# Altium PCB Init_Nfc_v1.0.PcbDoc
Units mm, origin at the board's own origin, x right, y up, seen from the top; angles counter-clockwise.
Board outline 84.91 x 61.77 mm, 2 copper layers (Top Layer, Bottom Layer); 25 components, 27 nets, 142 pads, 25 vias.
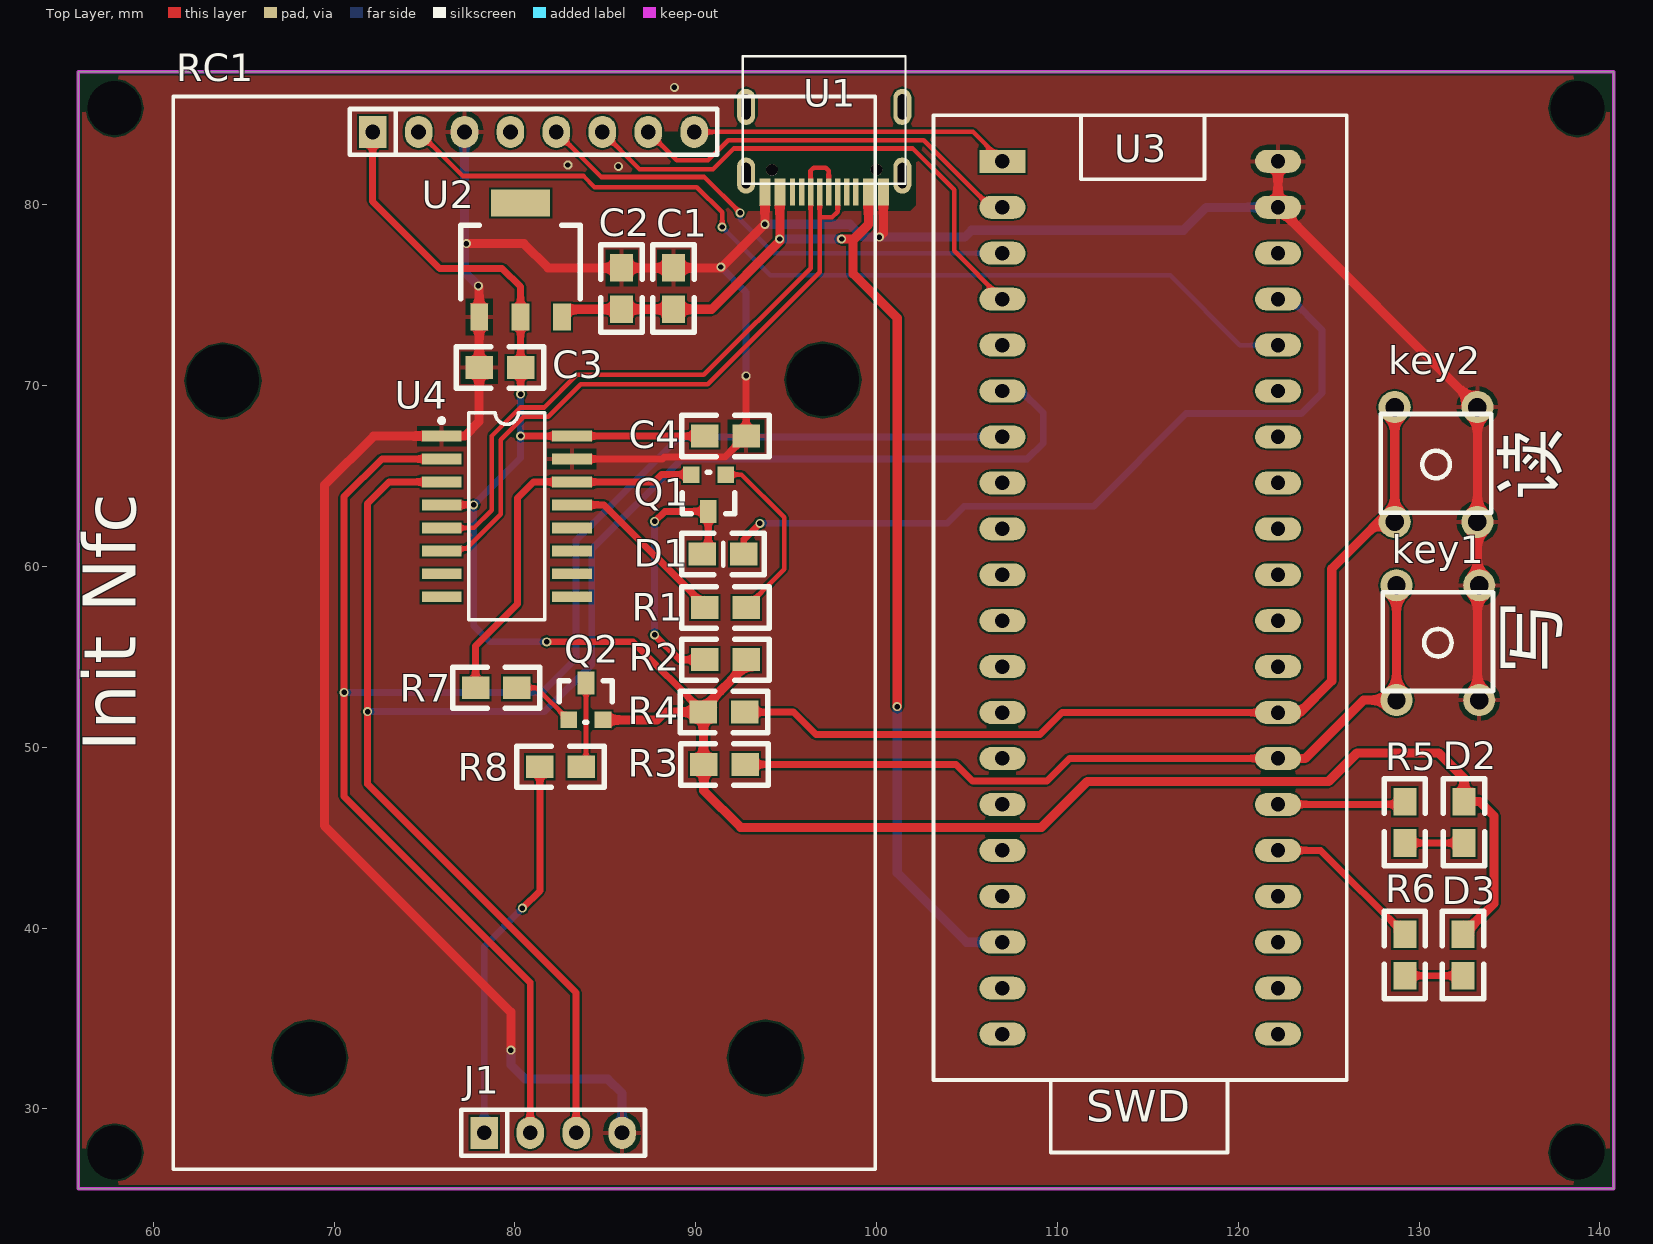
[diagram p0: Top Layer view]
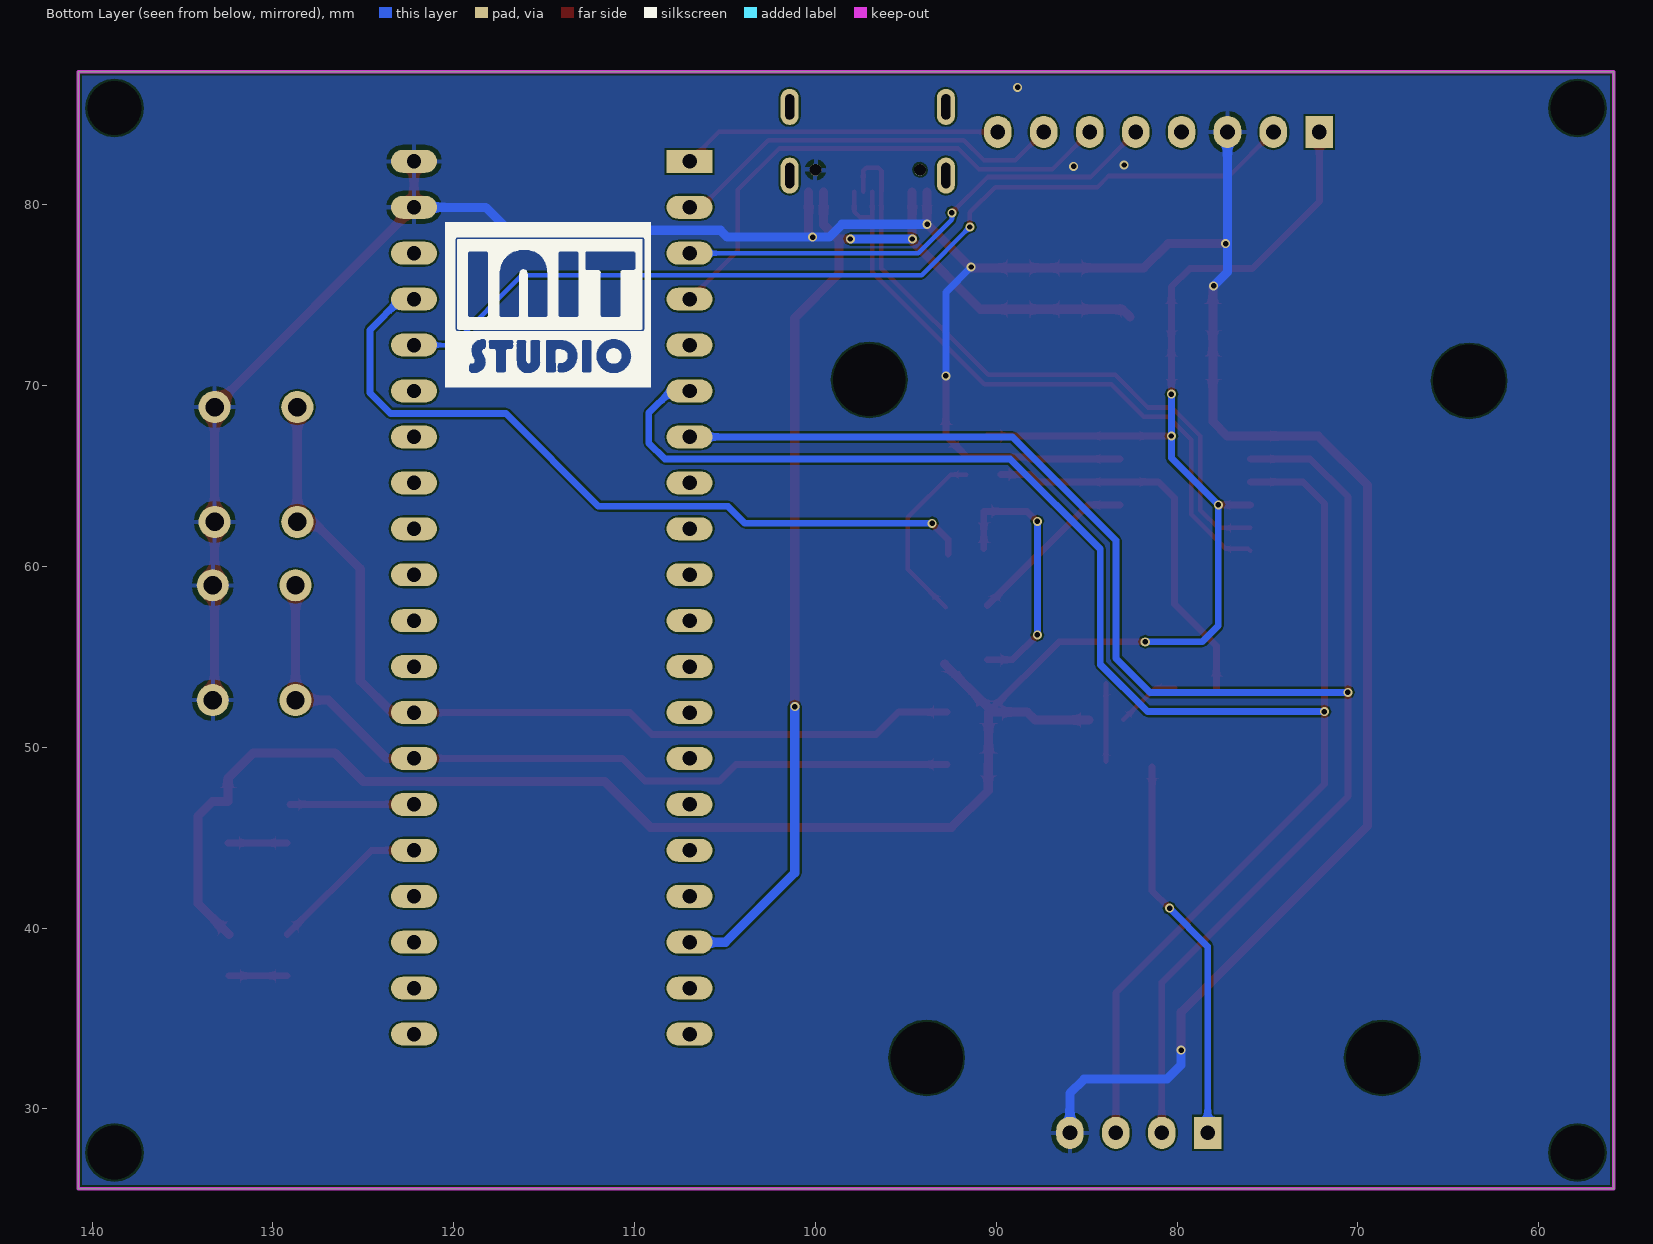
[diagram p1: Bottom Layer view, seen from below]

## Layer stack, top to bottom
Top Solder: solder mask 0.0102, Solder Resist, Dk 3.5
Top Layer: signal copper 0.0356
Dielectric1: dielectric 0.32, FR-4, Dk 4.8
Bottom Layer: signal copper 0.0356
Bottom Solder: solder mask 0.0102, Solder Resist, Dk 3.5

## Board outline
55.855,25.578 55.855,87.351 140.767,87.351 140.767,25.578

## Design rules (kind name [scope] priority, off if disabled: settings)
Clearance [All] p1: gap=0.1
DiffPairsRouting [All] p1: maxlimit=0.254 minlimit=0.254 mostfreqgap=0.254 toplayer_minwidth=0.152 toplayer_maxwidth=0.381 toplayer_prefwidth=0.381 bottomlayer_minwidth=0.152 bottomlayer_maxwidth=0.381 bottomlayer_prefwidth=0.381 maxuncoupledlength=12.7
PolygonConnect PolygonConnect_1 [IsVia] p1: connectstyle=Direct reliefconductorwidth=0.254 reliefentries=4 polygonreliefangle="90 Angle" airgapwidth=0.254
PolygonConnect [All] p2: connectstyle=Relief reliefconductorwidth=0.254 reliefentries=4 polygonreliefangle="90 Angle" airgapwidth=0.254
RoutingVias [All] p1: holewidth=0.3 width=0.5 viastyle="Through Hole" minholewidth=0.3 minwidth=0.5 maxholewidth=0.3 maxwidth=0.5
SilkToSolderMaskClearance SilkscreenOverComponentPads [IsPad] p1: minsilkscreentomaskgap=0.254 clearancetoexposedcopper=TRUE
SolderMaskExpansion [All] p1: expansion=0.102
Width [All] p1: maxlimit=2 minlimit=0.254 preferedwidth=0.254
28 further rules are at their usual default settings.

## Classes and differential pairs
differential pair UD: +UD_P -UD_N

## Components (designator, comment, footprint, x,y, rotation, side; value= is the part's Value field where it differs from the comment)
C1 "Cap" 0805 88.773,76.505 r270 top
C2 "Cap" 0805 85.903,76.505 r270 top
C3 "Cap" 0805 78.029,70.993 r0 top
C4 "Cap" 0805 92.786,67.208 r180 top
D1 "DIODE" 0805L 92.659,60.554 r180 top
D2 "LED0" 0805 132.486,46.99 r270 top
D3 "LED0" 0805 132.436,39.649 r270 top
J1 "CON4" SIP4 82.118,28.677 r0 top
key1 "KEY" Key 130.988,55.753 r180 top
key2 "KEY" Key 130.886,65.608 r180 top
Q1 "8050" SOT23 90.703,64.059 r180 top
Q2 "8550" SOT23 83.922,52.527 r0 top
R1 "Res2" 0805 90.5,57.734 r0 top
R2 "Res2" 0805 92.786,54.839 r180 top
R3 "Res2" 0805 90.449,49.047 r0 top
R4 "Res2" 0805 92.71,51.943 r180 top
R5 "Res2" 0805 129.21,44.704 r90 top
R6 "Res2" 0805 129.21,37.363 r90 top
R7 "Res2" 0805 80.112,53.289 r180 top
R8 "Res2" 0805 81.382,48.92 r0 top
RC1 "CON8" RC522_SIP8 72.136,84.023 r0 top
U1 "Type_C_16" Type_C16 97.104,83.21 r90 top
U2 "AMS1117_3.3" SOT-223 78.029,73.787 r0 top
U3 "stm32f103c8t6core" stm32f103DIP40 106.959,82.398 r0 top
U4 "CH340C" SOP16 79.553,62.763 r270 top

## Footprints (in the part's own frame and the unit in brackets; to place one, negate y for a bottom-side part, rotate by r counter-clockwise, add the part's x,y. Pads: shape width x height; smd on the part's side, far side on the other; paste and mask are expansions set on the pad)
0805 [mil]
  rect 60x50 smd: 1(0,0) 2(90,0)
  silkscreen extent -50,-45 140,45
0805L [mil]
  rect 60x50 smd: 1(0,-5) 2(90,-5)
  silkscreen extent -45,-50 135,40
Key [mil]
  round 70 hole 40: 1(-92,124) 1(-92,-126) 2(88,124) 2(88,-126)
  silkscreen extent -122,-111 118,104, body extent -122,-159 122,152, height 276
RC522_SIP8 [mil]
  round 60 hole 157.48: 0(-326,-542) 0(-137,-2016) 0(855,-2016) 0(980,-540)
  rect 60x70 hole 32: 1(0,0)
  oval 60x70 hole 32: 2(100,0) 3(200,0) 4(300,0) 5(400,0) 6(500,0) 7(600,0) 8(700,0)
  silkscreen extent -434,-2258 1094,77, body extent -54,-49 746,49, height 323
SIP4 [mil]
  rect 60x70 hole 32: 1(-150,0)
  oval 60x70 hole 32: 2(-50,0) 3(50,0) 4(150,0)
  silkscreen extent -200,-50 200,50, body extent -204,-49 196,49, height 323
SOP16 [mm] "Small Outline; 16 Leads; Body Width 5.6 mm; Pit"
  rect 0.6x2.2 smd: 1(-4.445,-3.6) 2(-3.175,-3.6) 3(-1.905,-3.6) 4(-0.635,-3.6) 5(0.635,-3.6) 6(1.905,-3.6) 7(3.175,-3.6) 8(4.445,-3.6) 9(4.445,3.6) 10(3.175,3.6) 11(1.905,3.6) 12(0.635,3.6) 13(-0.635,3.6) 14(-1.905,3.6) 15(-3.175,3.6) 16(-4.445,3.6)
  silkscreen extent -5.73,-3.72 5.73,2.1, body extent -5.1,-3.96 5.1,3.96, height 1.8
SOT23 [mil]
  rect 36x36 smd: B(-37.5,-40) E(37.5,-40)
  rect 36x50 smd: C(0.5,40)
  silkscreen extent -58,-45 58,45, body extent -58,-48 60,56, height 43
SOT-223 [mil]
  rect 39x59 smd: 1(0,0) 3(180,0)
  rect 38.98x59.05 smd: 2(90,0)
  rect 129.13x59 smd: 4(90,248.03)
  silkscreen extent -40,40 220,200
stm32f103DIP40 [mm]
  rect 2.54x1.27 hole 0.8: 1(0,0)
  oval 2.54x1.27 hole 0.8: 2(0,-2.54) 3(0,-5.08) 4(0,-7.62) 5(0,-10.16) 6(0,-12.7) 7(0,-15.24) 8(0,-17.78) 9(0,-20.32) 10(0,-22.86) 11(0,-25.4) 12(0,-27.94) 13(0,-30.48) 14(0,-33.02) 15(0,-35.56) 16(0,-38.1) 17(0,-40.64) 18(0,-43.18) 19(0,-45.72) 20(0,-48.26) 21(15.24,-48.26) 22(15.24,-45.72) 23(15.24,-43.18) 24(15.24,-40.64) 25(15.24,-38.1) 26(15.24,-35.56) 27(15.24,-33.02) 28(15.24,-30.48) 29(15.24,-27.94) 30(15.24,-25.4) 31(15.24,-22.86) 32(15.24,-20.32) 33(15.24,-17.78) 34(15.24,-15.24) 35(15.24,-12.7) 36(15.24,-10.16) 37(15.24,-7.62) 38(15.24,-5.08) 39(15.24,-2.54) 40(15.24,0)
  silkscreen extent -3.81,-54.81 19.05,2.54
Type_C16 [mm] "16pin"
  round 0.65 hole 0.65: 0(-1.28,2.89) 1(-1.28,-2.89)
  rect 1.5x0.6 smd: 1(-2.5,3.275) 2(-2.5,2.45) 11(-2.5,-2.45) 12(-2.5,-3.275)
  rect 1.5x0.3 smd: 3(-2.5,1.75) 4(-2.5,1.25) 5(-2.5,0.75) 6(-2.5,0.25) 7(-2.5,-0.25) 8(-2.5,-0.75) 9(-2.5,-1.25) 10(-2.5,-1.75)
  oval 2x1 hole 0.5 slot 1.4 at 0 deg: ""(-1.6,4.32) ""(-1.6,-4.32) ""(2.2,4.32) ""(2.2,-4.32)
  silkscreen extent -2.05,-4.5 5,4.5

## Part data
C1 C2 C3 C4: "Capacitor"
D2 D3: "Typical INFRARED GaAs LED"
Q1: library part NPN
Q2: library part PNP
R1 R2 R3 R4 R5 R6 R7 R8: "Resistor"
U2: library part LM317, "3-Terminal Adjustable Positive Voltage Regulator"

## Free pads (board coordinates)
  round 1.524 hole 3: 0(57.861,85.344) 0(57.861,27.584) 0(138.76,85.344) 0(138.76,27.584)

## Via types
v1: diameter 0.5, hole 0.3, Top Layer to Bottom Layer, 25 vias

## Nets (pads, with @x,y where several pads share a name; then routed paths per layer and width w, separated by ;. In a path a pad name is that pad's centre, name@x,y a point inside that pad or via, vN(x,y) a via of type N, cw(c..) or ccw(c..) an arc to the next point about the centre after c; other vN are vias at no path point)
3V3: C3.2 C4.2 D2.1 D3.1 Q2.E R2.1 R3.1 R4.2 RC1.1 U2.2 U4.4 U4.16 | length 129.8
  Top Layer w0.381: RC1.1 72.136,80.188 75.844,76.479 79.299,76.479 80.315,75.463 U2.2 C3.2 v1(80.315,69.52) ; U4.4 v1(77.724,63.398) ; v1(80.315,67.208) U4.16 C4.2 ; v1(81.763,55.829) 86.538,55.829 R4.2 ; R3.1 R3.1@90.449,49.073 ; R4.2@90.449,51.943 R4.2@90.449,52.197
  Top Layer w0.508: Q2.E 87.859,51.511 88.29,51.943 R4.2 R3.1@90.424,49.073 ; R3.1 90.449,47.6 92.481,45.568 109.118,45.568 111.658,48.108 124.993,48.108 126.568,49.682 131.089,49.682 132.486,48.285 D2.1 133.35,46.99 134.137,46.203 134.137,41.351 D3.1 ; R4.2@90.449,52.197 R2.1@92.85,54.597
  Bottom Layer w0.381: v1(80.315,69.52) 80.315,65.989 v1(77.724,63.398) 77.724,56.718 78.613,55.829 v1(81.763,55.829)
5V: C1.2 C2.2 U1.2 U1.11 U2.3 U3.18 | length 67
  Top Layer w0.508: U2.3 83.033,74.219 C2.2 C1.2 90.881,74.219 94.654,77.992 U1.2 ; v1@98.044,78.105 v1(98.069,78.105) 98.704,78.105 98.704,76.175 101.143,73.736 v1(101.143,52.248) ; 98.755,78.105 99.554,78.904 U1.11
  Bottom Layer w0.508: v1(94.64,78.105) v1(98.069,78.105) ; v1(101.143,52.248) 101.143,43.053 104.978,39.218 U3.18
BOOT0: J1.1 R8.1 | length 21.5
  Top Layer w0.381: v1(80.416,41.097) 81.382,42.062 R8.1
  Bottom Layer w0.381: J1.1 78.308,38.989 v1(80.416,41.097)
CH340_RX: J1.3 U3.6 U4.3 | length 95.8
  Top Layer w0.381: U4.3 73.05,64.668 71.857,63.475 71.857,47.955 83.388,36.424 J1.3
  Bottom Layer w0.381: v1(71.857,51.968) 81.636,51.968 84.252,54.585 84.252,60.96 89.23,65.938 108.331,65.938 109.22,66.827 109.22,68.478 108.001,69.698 U3.6
CH340_TX: J1.2 U3.7 U4.2 | length 91.8
  Top Layer w0.381: U4.2 72.644,65.938 70.561,63.856 70.561,47.269 80.848,36.982 J1.2
  Bottom Layer w0.381: v1(70.561,53.035) 81.509,53.035 83.388,54.915 83.388,61.443 89.103,67.158 U3.7
GND: C1.1 C2.1 C3.1 C4.1 J1.4 key1.1 key2.1 RC1.3 U1.1 U1.12 U2.1 U3.39 U3.40 U4.1 U4.15 | length 177.8
  Top Layer w0.381: U4.15 88.163,65.938 88.265,66.04 91.618,66.04 C4.1 v1(92.786,70.536)
  Top Layer w0.5: v1(77.318,77.851) 80.493,77.851 81.839,76.505 C2.1 C1.1 91.415,76.505 v1(93.829,78.919) U1.1@93.829,80.71 ; v1(77.978,75.514) 78.029,75.463 U2.1 C3.1 78.029,68.021 77.216,67.208 U4.1 72.187,67.208 69.469,64.491 69.469,45.669 79.781,35.357 v1(79.781,33.249) ; v1(100.152,78.207) 100.379,78.434 U1.12
  Top Layer w0.508: U3.40 U3.39 133.223,68.834 133.223,68.809 133.223,62.459 key1.1@133.223,52.705
  Bottom Layer w0.381: v1(91.389,76.556) 92.786,75.159 v1(92.786,70.536)
  Bottom Layer w0.5: RC1.3 77.216,76.276 v1(77.978,75.514) ; v1(79.781,33.249) 79.781,32.436 80.569,31.648 85.141,31.648 85.928,30.861 J1.4 ; v1(93.829,78.919) 98.525,78.919 99.238,78.207 v1(100.152,78.207) 104.877,78.207 105.258,78.588 116.967,78.588 118.237,79.858 U3.39
  other v1: 85.725,82.118 82.931,82.194 88.824,86.487
KEY1: key1.2 R3.2 U3.27 | length 44.6
  Top Layer w0.381: R3.2 104.394,49.047 105.308,48.133 109.423,48.133 110.668,49.378 U3.27
  Top Layer w0.508: U3.27 123.698,49.378 126.924,52.603 128.753,52.603 key1.2@128.753,58.953
KEY2: key2.2 R4.1 U3.28 | length 51.3
  Top Layer w0.381: R4.1 95.402,51.943 96.647,50.698 109.042,50.698 110.261,51.918 U3.28
  Top Layer w0.508: U3.28 123.419,51.918 125.171,53.67 125.171,59.868 127.762,62.459 128.651,62.459 key2.2@128.651,68.809
LED1: R5.2 U3.26 | length 6.9
  Top Layer w0.381: U3.26 R5.2@129.057,46.838
LED2: R6.2 U3.25 | length 8.9
  Top Layer w0.381: U3.25 124.562,44.298 R6.2
MCU_RTS: D1.1 U3.37 | length 42.8
  Top Layer w0.381: D1.1 92.659,61.493 v1(93.548,62.382)
  Bottom Layer w0.381: v1(93.548,62.382) 103.886,62.382 104.826,63.322 111.989,63.322 117.119,68.453 123.495,68.453 124.638,69.596 124.638,73.076 122.936,74.778 U3.37
NetD1_2: D1.2 Q1.C R2.2 | length 14.8
  Top Layer w0.381: v1(87.732,56.21) 89.103,54.839 R2.2 ; v1(87.732,62.484) 88.29,63.043 Q1.C D1.2@90.691,60.998
  Bottom Layer w0.381: v1(87.732,56.21) v1(87.732,62.484)
NetD2_2: D2.2 R5.1 | length 3.3
  Top Layer w0.381: R5.1 D2.2
NetD3_2: D3.2 R6.1 | length 3.2
  Top Layer w0.381: R6.1 D3.2
NetQ1_B: Q1.B R1.2 | length 10.1
  Top Layer w0.254: Q1.B 92.532,65.075 94.894,62.713 94.894,59.842 R1.2
NetQ1_e: Q1.E R7.2 U4.14 | length 21.6
  Top Layer w0.381: R7.2 77.826,55.601 80.137,57.912 80.137,63.779 81.026,64.668 U4.14 87.706,64.668 88.113,65.075 Q1.E
NetQ2_B: Q2.B R7.1 | length 3.6
  Top Layer w0.254: R7.1 81.191,53.289 Q2.B
NetQ2_C: Q2.C R8.2 | length 4.4
  Top Layer w0.254: R8.2@83.934,49.187 Q2.C
NetR1_1: R1.1 U4.13 | length 9.7
  Top Layer w0.381: U4.13 84.938,63.398 R1.1@90.5,57.836
RC522_CS: RC1.8 U3.1 | length 17.7
  Top Layer w0.254: RC1.8 105.334,84.023 U3.1
RC522_IRQ: RC1.4
RC522_RST: RC1.2 U3.36 | length 52.9
  Top Layer w0.254: RC1.2 77.114,81.585 83.795,81.585 84.404,80.975 90.068,80.975 91.465,79.578 v1(91.465,78.765)
  Bottom Layer w0.254: v1(91.465,78.765) 94.132,76.098 116.23,76.098 120.091,72.238 U3.36
SPI2_CLK: RC1.7 U3.2 | length 22.2
  Top Layer w0.254: RC1.7 88.951,82.448 90.678,82.448 91.796,83.566 102.616,83.566 106.324,79.858 U3.2
SPI2_MISO: RC1.5 U3.3 | length 27.7
  Top Layer w0.254: RC1.5 84.785,81.534 90.475,81.534 v1(92.456,79.553)
  Bottom Layer w0.254: v1(92.456,79.553) 92.456,79.172 94.31,77.318 U3.3
SPI2_MOSI: RC1.6 U3.4 | length 28.9
  Top Layer w0.254: RC1.6 86.893,81.966 90.957,81.966 92.1,83.109 102.006,83.109 104.292,80.823 104.292,77.445 U3.4
UD_N: U1.6 U1.8 U4.6 | length 36.3
  Top Layer w0.254: U4.6 76.08,60.985 77.318,60.985 79.223,62.89 79.223,66.998 80.5,68.275 81.839,68.275 83.642,70.079 90.66,70.079 96.854,76.273 U1.6 ; 96.862,79.299 97.536,79.299 97.854,79.617 U1.8
UD_P: U1.5 U1.7 U4.5 | length 36.4
  Top Layer w0.254: U4.5 77.742,62.128 78.715,63.101 78.715,67.208 80.289,68.783 81.628,68.783 83.432,70.587 90.449,70.587 96.354,76.491 U1.5 ; U1.5@96.346,80.71 96.346,81.868 96.52,82.042 97.18,82.042 97.354,81.868 U1.7
pads on no net: RC1.0 U1. U1.0 U1.3 U1.4 U1.9 U1.10 U2.4 U3.5 U3.8 U3.9 U3.10 U3.11 U3.12 U3.13 U3.14 U3.15 U3.16 U3.17 U3.19 U3.20 U3.21 U3.22 U3.23 U3.24 U3.29 U3.30 U3.31 U3.32 U3.33 U3.34 U3.35 U3.38 U4.7 U4.8 U4.9 U4.10 U4.11 U4.12

## Polygon pours and split planes (outlines as drawn)
GND on Top Layer "Top Layer-No Net" (solid, remove dead copper, pour order 2): 55.855,87.351 140.767,87.351 140.767,25.578 55.855,25.578 55.855,87.351
GND on Bottom Layer "Top Layer-No Net" (solid, remove dead copper, pour order 3): 55.855,87.351 140.767,87.351 140.767,25.578 55.855,25.578 55.855,87.351

## Keep-outs
Keep-Out Layer:
  the board outline again, w0.203

## Other copper
Top Layer:
  pour cut-out: 91.796,82.931 91.796,84.023 87.376,84.023 89.002,82.398 91.262,82.398
  pour cut-out: 92.202,82.863 101.905,82.863 102.159,82.609 102.159,79.959 101.854,79.654 92.685,79.654 92.202,80.137 92.202,82.863

## Silkscreen, mask and mechanical layers (free items; w line width, h text height)
Top Overlay:
  text "读" at 138.532,63.627 h5 r90
  text "写" at 138.583,54.051 h5 r90
  text "Init Nfc" at 59.995,49.759 h5 r90
Bottom Overlay:
  drawing of 2869 lines, arcs and shapes, not listed

## Text inside footprints (layer, text, board x,y; h text height)
U3: Top Overlay "SWD" at 111.582,28.702 h3